# EAGLE board scheme (EAGLE 9.6.2)
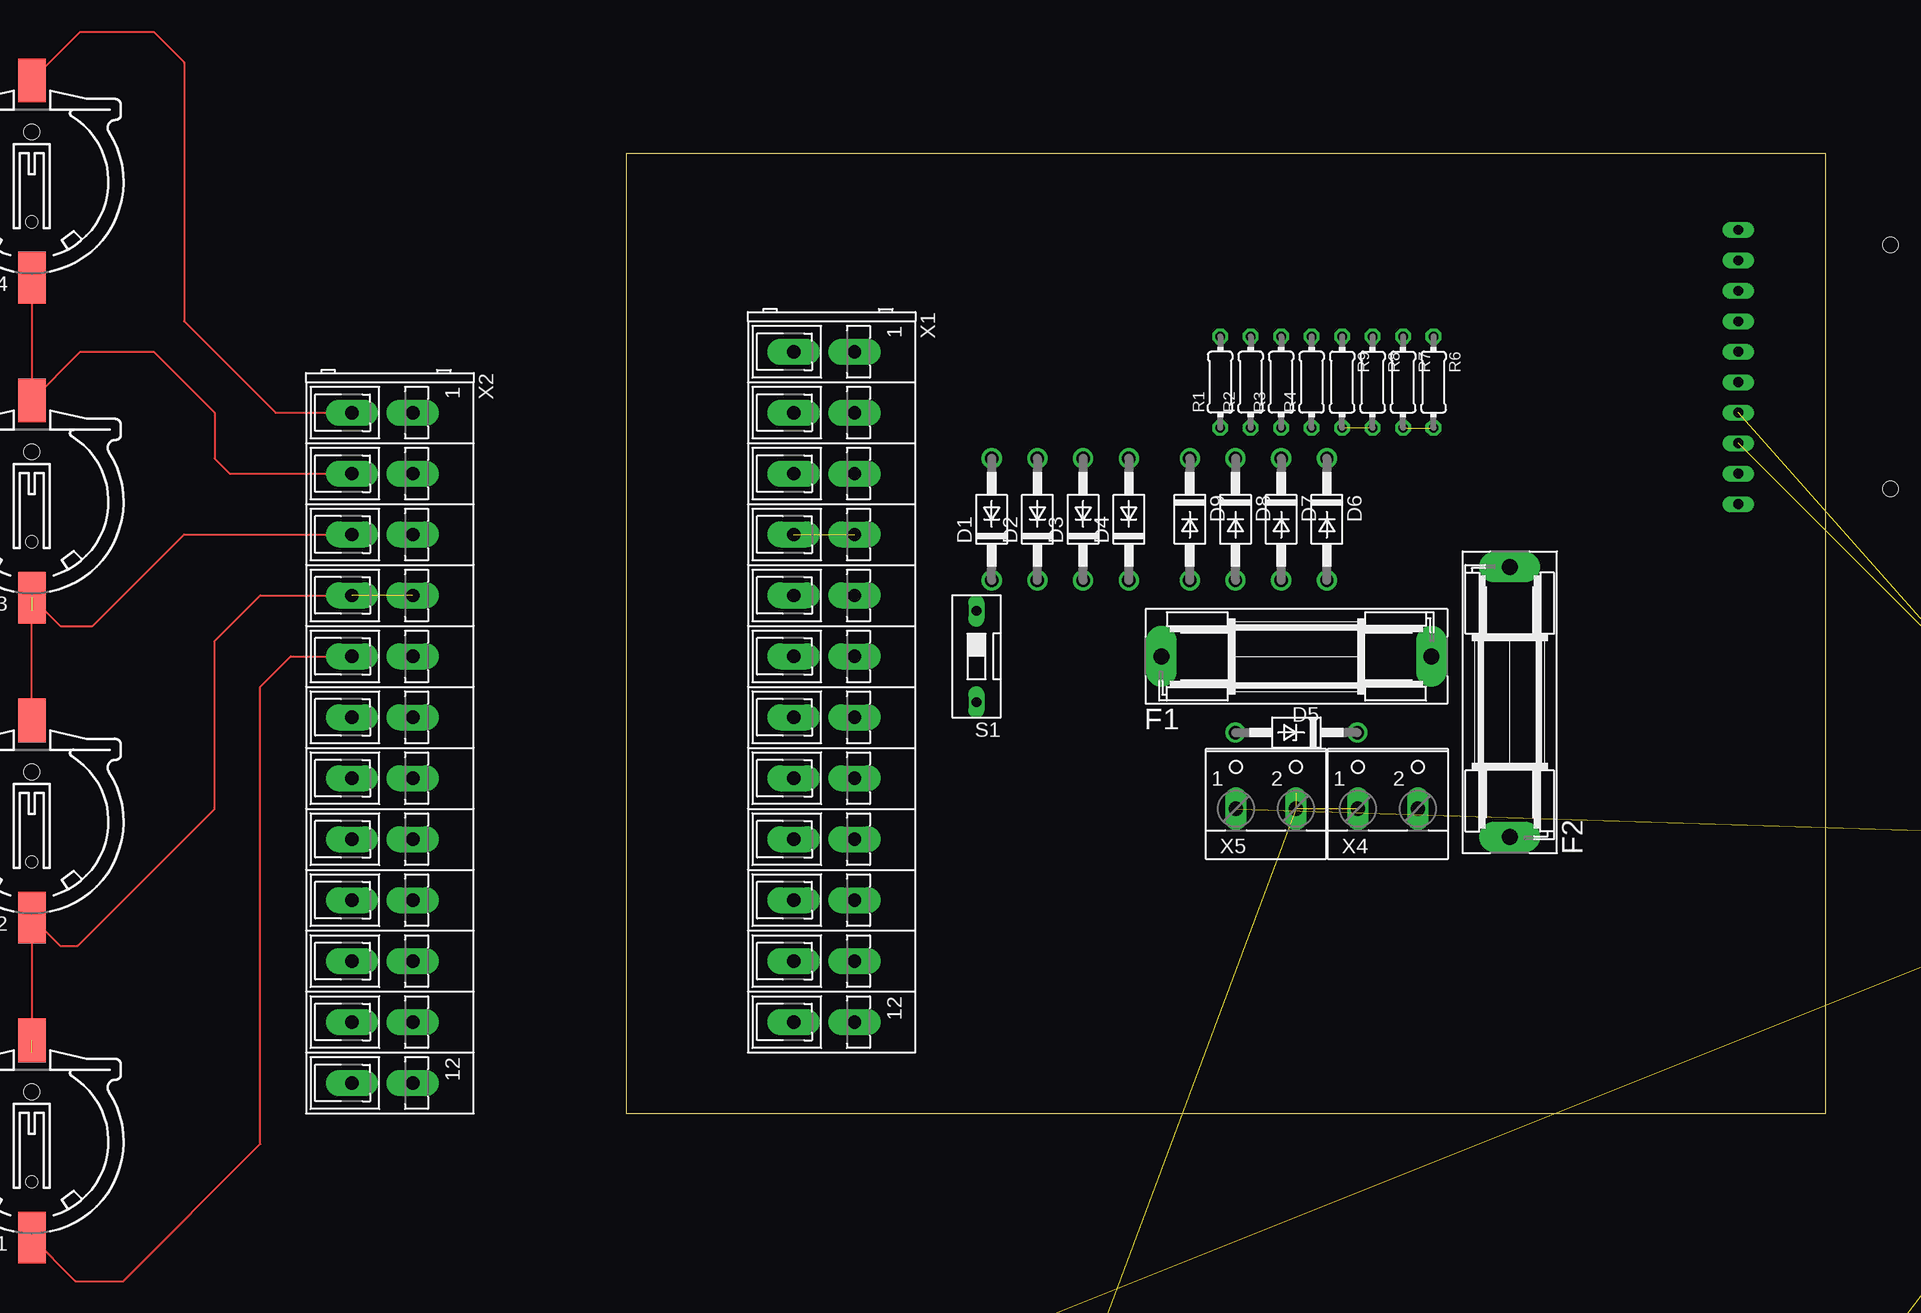
[diagram p0: board, top side]
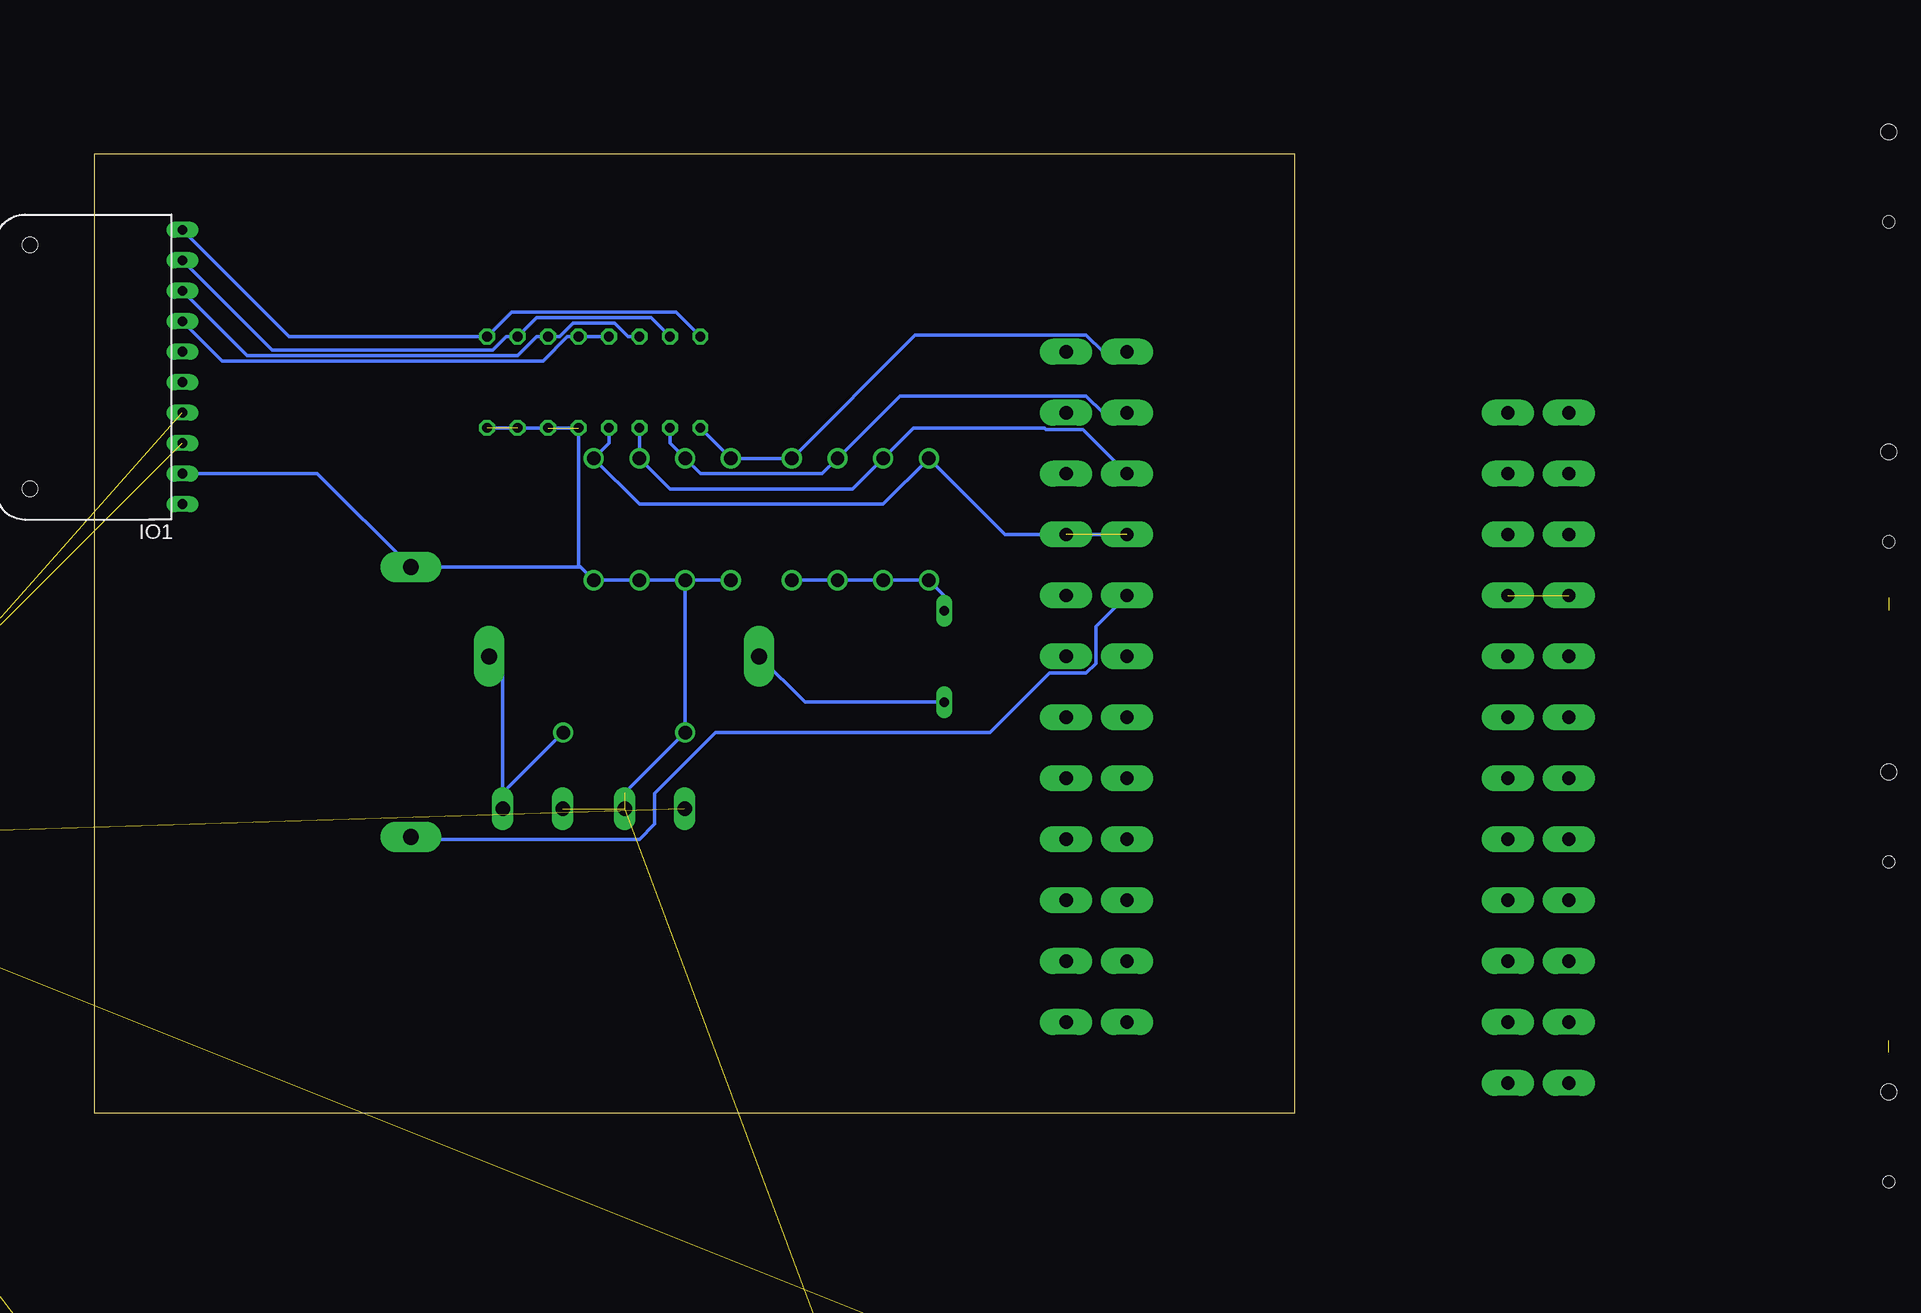
[diagram p1: board, bottom side, seen from below]

Size 100 x 80 mm. Coordinates in mm from the lower left corner, seen from the top.
Outline: 0,0 100,0 100,80 0,80 0,0
Copper layers (1*16): Top 0.035mm / dielectric 1.5mm / Bottom 0.035mm
Design rules "default *": minimum track width 6mil, minimum drill 0.35mm, track to track 6mil, track to pad 12mil, pad to pad 6mil, via to via 6mil, smd to smd 6mil, copper to edge 40mil, drill to drill 6mil, minimum pad ring 10mil, minimum via ring 8mil, stop-mask expansion 4mil, vias tented up to drill 0mil, thermal gap 10mil

## Footprints (pad centres in the part's own frame; a part is rotated, then mirrored left to right if it is on the bottom)
DO41-10 = drill 1.118: A 5.08,0; C -5.08,0
DO41Z10 = drill 1.118: A 5.08,0; C -5.08,0
SH22,5 = drill 1.321 pad 2.54 long: 1 -11.252,0; 2 11.252,0
CH291-1220LF = smd 2.3 x 3.66: + 0,-2.296 | smd 2.3 x 4.3: - 0,14.146 | hole 1.3: 0,2 | hole 1: 0,9.5
10PIN = drill 0.813 long: 1 -10.16,-3.81; 2 -7.62,-3.81; 3 -5.08,-3.81; 4 -2.54,-3.81; 5 0,-3.81; 6 2.54,-3.81; 7 5.08,-3.81; 8 7.62,-3.81; 9 10.16,-3.81; 10 12.7,-3.81 | hole 1.27: -8.89,8.89; 11.43,8.89
0204/7 = drill 0.813 octagon: 1 -3.81,0; 2 3.81,0
PT-10 = drill 1.016 pad 1.778 octagon: 1 -2.54,-5.08; 2 2.54,-5.08; 3 0,5.08
0207/10 = drill 0.813 octagon: 1 -5.08,0; 2 5.08,0
DS-01 = drill 0.813 long: 1 0,-3.81; 2 0,3.81
MODULE_ESP32-DEVKITC-32D = drill 1.04 square: 1 -12.7,19.76 | drill 1.04: 2 -12.7,17.22; 3 -12.7,14.68; 4 -12.7,12.14; 5 -12.7,9.6; 6 -12.7,7.06; 7 -12.7,4.52; 8 -12.7,1.98; 9 -12.7,-0.56; 10 -12.7,-3.1; 11 -12.7,-5.64; 12 -12.7,-8.18; 13 -12.7,-10.72; 14 -12.7,-13.26; 15 -12.7,-15.8; 16 -12.7,-18.34; 17 -12.7,-20.88; 18 -12.7,-23.42; 19 -12.7,-25.96; 20 12.7,19.76; 21 12.7,17.22; 22 12.7,14.68; 23 12.7,12.14; 24 12.7,9.6; 25 12.7,7.06; 26 12.7,4.52; 27 12.7,1.98; 28 12.7,-0.56; 29 12.7,-3.1; 30 12.7,-5.64; 31 12.7,-8.18; 32 12.7,-10.72; 33 12.7,-13.26; 34 12.7,-15.8; 35 12.7,-18.34; 36 12.7,-20.88; 37 12.7,-23.42; 38 12.7,-25.96
LCD-I2C-CONVERTER = drill 1 square: J1.1 -19.05,-5.08; J2.1 19.05,6.35 | drill 1: J1.2 -19.05,-2.54; J1.3 -19.05,0; J1.4 -19.05,2.54; J2.2 16.51,6.35; J2.3 13.97,6.35; J2.4 11.43,6.35; J2.5 8.89,6.35; J2.6 6.35,6.35; J2.7 3.81,6.35; J2.8 1.27,6.35; J2.9 -1.27,6.35; J2.10 -3.81,6.35; J2.11 -6.35,6.35; J2.12 -8.89,6.35; J2.13 -11.43,6.35; J2.14 -13.97,6.35; J2.15 -16.51,6.35; J2.16 -19.05,6.35
CARD-SD-ADAPTER = drill 1 square: 1 -21.59,8.89 | drill 1: 2 -19.05,8.89; 3 -21.59,6.35; 4 -19.05,6.35; 5 -21.59,3.81; 6 -19.05,3.81; 7 -21.59,1.27; 8 -19.05,1.27; 9 -21.59,-1.27; 10 -19.05,-1.27; 11 -21.59,-3.81; 12 -19.05,-3.81; 13 -21.59,-6.35; 14 -19.05,-6.35; 15 -21.59,-8.89; 16 -19.05,-8.89 | hole 2.5: -20.32,12.5; -20.32,-12.5
USB-SERIAL-FT232R = drill 1 square: 1 11.43,6.35 | drill 1: 2 11.43,3.81; 3 11.43,1.27; 4 11.43,-1.27; 5 11.43,-3.81; 6 11.43,-6.35
236-412 = drill 1.118 pad 2.184 long: 1@1 0,-2.54; 1@2 0,2.54; 2@1 5.08,-2.54; 2@2 5.08,2.54; 3@1 10.16,-2.54; 3@2 10.16,2.54; 4@1 15.24,-2.54; 4@2 15.24,2.54; 5@1 20.32,-2.54; 5@2 20.32,2.54; 6@1 25.4,-2.54; 6@2 25.4,2.54; 7@1 30.48,-2.54; 7@2 30.48,2.54; 8@1 35.56,-2.54; 8@2 35.56,2.54; 9@1 40.64,-2.54; 9@2 40.64,2.54; 10@1 45.72,-2.54; 10@2 45.72,2.54; 11@1 50.8,-2.54; 11@2 50.8,2.54; 12@1 55.88,-2.54; 12@2 55.88,2.54
W237-102 = drill 1.194 long: 1 -2.5,-1.27; 2 2.5,-1.27

## Placement (x,y rotation side)
D1  1N4004  [DO41-10]  30.48,49.53 90 top
D2  1N4004  [DO41-10]  34.29,49.53 90 top
D3  1N4004  [DO41-10]  38.1,49.53 90 top
D4  1N4004  [DO41-10]  41.91,49.53 90 top
D5  [DO41Z10]  55.88,31.75 180 top
D6  1N4004  [DO41-10]  58.42,49.53 270 top
D7  1N4004  [DO41-10]  54.61,49.53 270 top
D8  1N4004  [DO41-10]  50.8,49.53 270 top
D9  1N4004  [DO41-10]  46.99,49.53 270 top
F1  FUSESH22,5  [SH22,5]  55.88,38.1 0 top
F2  FUSESH22,5  [SH22,5]  73.66,34.29 90 top
G1  CH291-1220LF  [CH291-1220LF]  -49.53,3.81 180 top  (outside the outline)
G2  CH291-1220LF  [CH291-1220LF]  -49.53,30.48 180 top  (outside the outline)
G3  CH291-1220LF  [CH291-1220LF]  -49.53,57.15 180 top  (outside the outline)
G4  CH291-1220LF  [CH291-1220LF]  -49.53,83.82 180 top  (outside the outline)
IO1  [10PIN]  96.52,60.96 90 bottom
R1  110k  [0204/7]  49.53,60.96 90 top
R2  110k  [0204/7]  52.07,60.96 90 top
R3  110k  [0204/7]  54.61,60.96 90 top
R4  110k  [0204/7]  57.15,60.96 90 top
R5  [PT-10]  19.05,-74.93 0 top  (outside the outline)
R6  10k  [0204/7]  67.31,60.96 270 top
R7  10k  [0204/7]  64.77,60.96 270 top
R8  10k  [0204/7]  62.23,60.96 270 top
R9  10k  [0204/7]  59.69,60.96 270 top
R10  [0207/10]  -92.71,-85.09 0 top  (outside the outline)
S1  [DS-01]  29.21,38.1 180 top
S3  [DS-01]  -5.08,-36.83 0 top  (outside the outline)
S4  [DS-01]  -105.41,-78.74 0 top  (outside the outline)
U1  ESP32-DEVKITC-32D  [MODULE_ESP32-DEVKITC-32D]  81.28,-48.26 0 top  (outside the outline)
U$1  LCD-I2C-CONVERTER  [LCD-I2C-CONVERTER]  151.13,16.51 0 top  (outside the outline)
U$2  CARD-SD-ADAPTER  [CARD-SD-ADAPTER]  152.4,-27.94 0 top  (outside the outline)
U$3  USB-SERIAL-FT232R  [USB-SERIAL-FT232R]  -86.36,-59.69 0 top  (outside the outline)
X1  236-412  [236-412]  16.51,63.5 270 top
X2  236-412  [236-412]  -20.32,58.42 270 top  (outside the outline)
X4  [W237-102]  63.5,26.67 0 top
X5  [W237-102]  53.34,26.67 0 top

## Library data of the parts
D1-D9 = diode
F1 F2 = fuse; OC_FARNELL: unknown; OC_NEWARK: unknown
G1-G4 = battery
IO1 = fslib
R1-R4 R6-R10 = rcl; SPICEPREFIX: R
R5 = rcl; SPICEMODEL: POT; SPICEPREFIX: X
S1 S3 S4 = switch-dil; OC_FARNELL: unknown; OC_NEWARK: unknown
U1 = ESP32-DEVKITC-32D; AVAILABILITY: In Stock; DESCRIPTION: WiFi Development Tools (802.11) ESP32 General Development Kit, ESP32-WROOM-32D on the board; MF: Espressif Systems; MP: ESP32-DEVKITC-32D; PACKAGE: None; PRICE: None; PURCHASE-URL: https://pricing.snapeda.com/search/part/ESP32-DEVKITC-32D/?ref=eda
U$1 U$2 = i2c_lcd_convertor
U$3 = USB-SERIAL-CP2102
X1 X2 = con-wago-508; MF: Wago Corporation; MPN: 0236-0412; OC_FARNELL: 1283531; OC_NEWARK: 79K2064
X4 X5 = con-wago-500; MPN: 237-102; OC_FARNELL: unknown; OC_NEWARK: 70K9898

## Nets
3V3: U1.1 U$2.3
+5V: R10.2 S3.1 U1.19 U$1.J1.1 U$1.J1.4 U$1.J2.16 U$2.1 U$2.5 X5.1
GND: D5.A D6.A D7.A D8.A D9.A F2.2 IO1.2 R5.1 R6.2 R7.2 R8.2 R9.2 S4.2 X4.1 X5.2
GND1: U1.14
GND2: U1.26
GND3: U1.20
GND.2: U$2.15
N$1: U1.23 U$2.9
N$2: IO1.7 R4.2 R9.1
N$3: U1.28 U$2.11
N$4: U1.27 U$2.13
N$5: U1.29 U$2.7
N$6: IO1.8 R3.2 R8.1
N$7: IO1.9 R2.2 R7.1
N$8: IO1.10 R1.2 R6.1
N$9: R5.3 U1.7
N$10: D1.C D2.C D3.C D4.C S1.1
N$11: F1.1 S1.2
N$12: D5.C F1.2 X4.2
N$13: G1.+ G2.- X2.4@1 X2.4@2
N$14: D4.A D9.C R1.1 X1.1@1
N$15: G3.+ G4.- X2.2@1
N$16: G4.+ X2.1@1
N$17: D3.A D8.C R2.1 X1.2@1
N$18: F2.1 X1.5@1
N$19: D2.A D7.C R3.1 X1.3@1
N$20: D1.A D6.C R4.1 X1.4@1 X1.4@2
N$21: G1.- X2.5@1
N$23: G2.+ G3.- X2.3@1
N$24: S3.2 U$1.J2.15
N$25: U$3.4
N$26: U$3.6
N$27: U$3.3
N$28: U$3.2
N$29: R5.2 R10.1
N$30: S4.1 U1.32
RX: U1.16
SCL: IO1.3 U1.22 U$1.J1.3
SDA: IO1.4 U1.25 U$1.J1.2
TX: U1.17
VDD: IO1.1

## Tracks (layer width: path | path; a pad name or v marks a point on that pad's centre or on a via)
3V3  (1 unrouted)
+5V  (8 unrouted)
GND  (6 unrouted)
  Bottom 0.305: D9.A D8.A | D8.A D7.A D6.A 59.51,45.54 | 55.84,26.71 D5.A D8.A | 59.51,45.54 F2.2 81.46,53.34 IO1.2 | 59.51,45.54 59.69,45.72 R9.2 R6.2
N$1  (1 unrouted)
N$2
  Bottom 0.305: R4.2 R9.1 60.62,64.77 62.66,62.74 89.41,62.74 IO1.7
N$3  (1 unrouted)
N$4  (1 unrouted)
N$5  (1 unrouted)
N$6
  Bottom 0.305: R3.2 55.57,64.77 56.69,65.89 60.15,65.89 61.27,64.77 R8.1 63.19,64.77 64.76,63.2 87.33,63.2 IO1.8
N$7
  Bottom 0.305: R2.2 53.65,66.34 63.2,66.34 R7.1 65.73,64.77 66.85,63.65 85.24,63.65 IO1.9
N$8
  Bottom 0.305: R1.2 51.56,66.8 65.28,66.8 R6.1 83.82,64.77 IO1.10
N$9  (1 unrouted)
N$10
  Bottom 0.305: D4.C D3.C D2.C D1.C 29.21,43.18 S1.1
N$11
  Bottom 0.305: F1.1 40.82,34.29 S1.2
N$12
  Bottom 0.305: D5.C 66,26.71 X4.2 66,36.97 F1.2
N$13  (2 unrouted)
  Top 0.152: -49.53,5.08 G2.- -47.17,13.97 -45.72,13.97 -34.29,25.4 -34.29,39.37 -30.48,43.18 X2.4@1
N$14
  Bottom 0.305: X1.1@1 15.98,63.5 17.38,64.9 31.62,64.9 D4.A D9.C R1.1
N$15
  Top 0.152: G4.- G3.+ -45.48,63.5 -39.37,63.5 -34.29,58.42 -34.29,54.61 -33.02,53.34 X2.2@1
N$16
  Top 0.152: G4.+ -45.48,90.17 -39.37,90.17 -36.83,87.63 -36.83,66.04 -29.21,58.42 X2.1@1
N$17
  Bottom 0.305: X1.2@1 15.98,58.42 17.38,59.82 32.89,59.82 D3.A 39.37,53.34 49.53,53.34 D8.C 52.07,55.88 R2.1
N$18
  Bottom 0.152: 73.66,23.02 F2.1
  Bottom 0.305: F2.1 73.48,22.86 54.61,22.86 53.34,24.13 53.34,26.67 48.26,31.75 25.4,31.75 20.45,36.7 17.38,36.7 16.56,37.52 16.56,40.59 X1.5@1
N$19
  Bottom 0.305: X1.3@1 17.65,57.02 20.72,57.02 20.85,57.15 31.75,57.15 D2.A 36.83,52.07 52.07,52.07 D7.C R3.1
N$20  (1 unrouted)
  Bottom 0.305: X1.4@1 24.13,48.26 D1.A 34.29,50.8 54.61,50.8 D6.C 57.15,55.88 R4.1
N$21
  Top 0.152: G1.- -45.9,-13.97 -41.91,-13.97 -30.48,-2.54 -30.48,35.56 -27.94,38.1 X2.5@1
N$23  (1 unrouted)
  Top 0.152: G2.+ -49.53,41.91 | G3.- -47.17,40.64 -44.45,40.64 -36.83,48.26 X2.3@1
N$24  (1 unrouted)
N$29  (1 unrouted)
N$30  (1 unrouted)
SCL  (2 unrouted)
SDA  (2 unrouted)